# Altium PCB PCB2.PcbDoc (part 1 of 2)
Units mil, origin at the board's own origin, x right, y up, seen from the top; angles counter-clockwise.
Board outline 6000 x 4000 mil, 2 copper layers (Top Layer, Bottom Layer); 194 components, 0 nets, 778 pads, 711 vias.
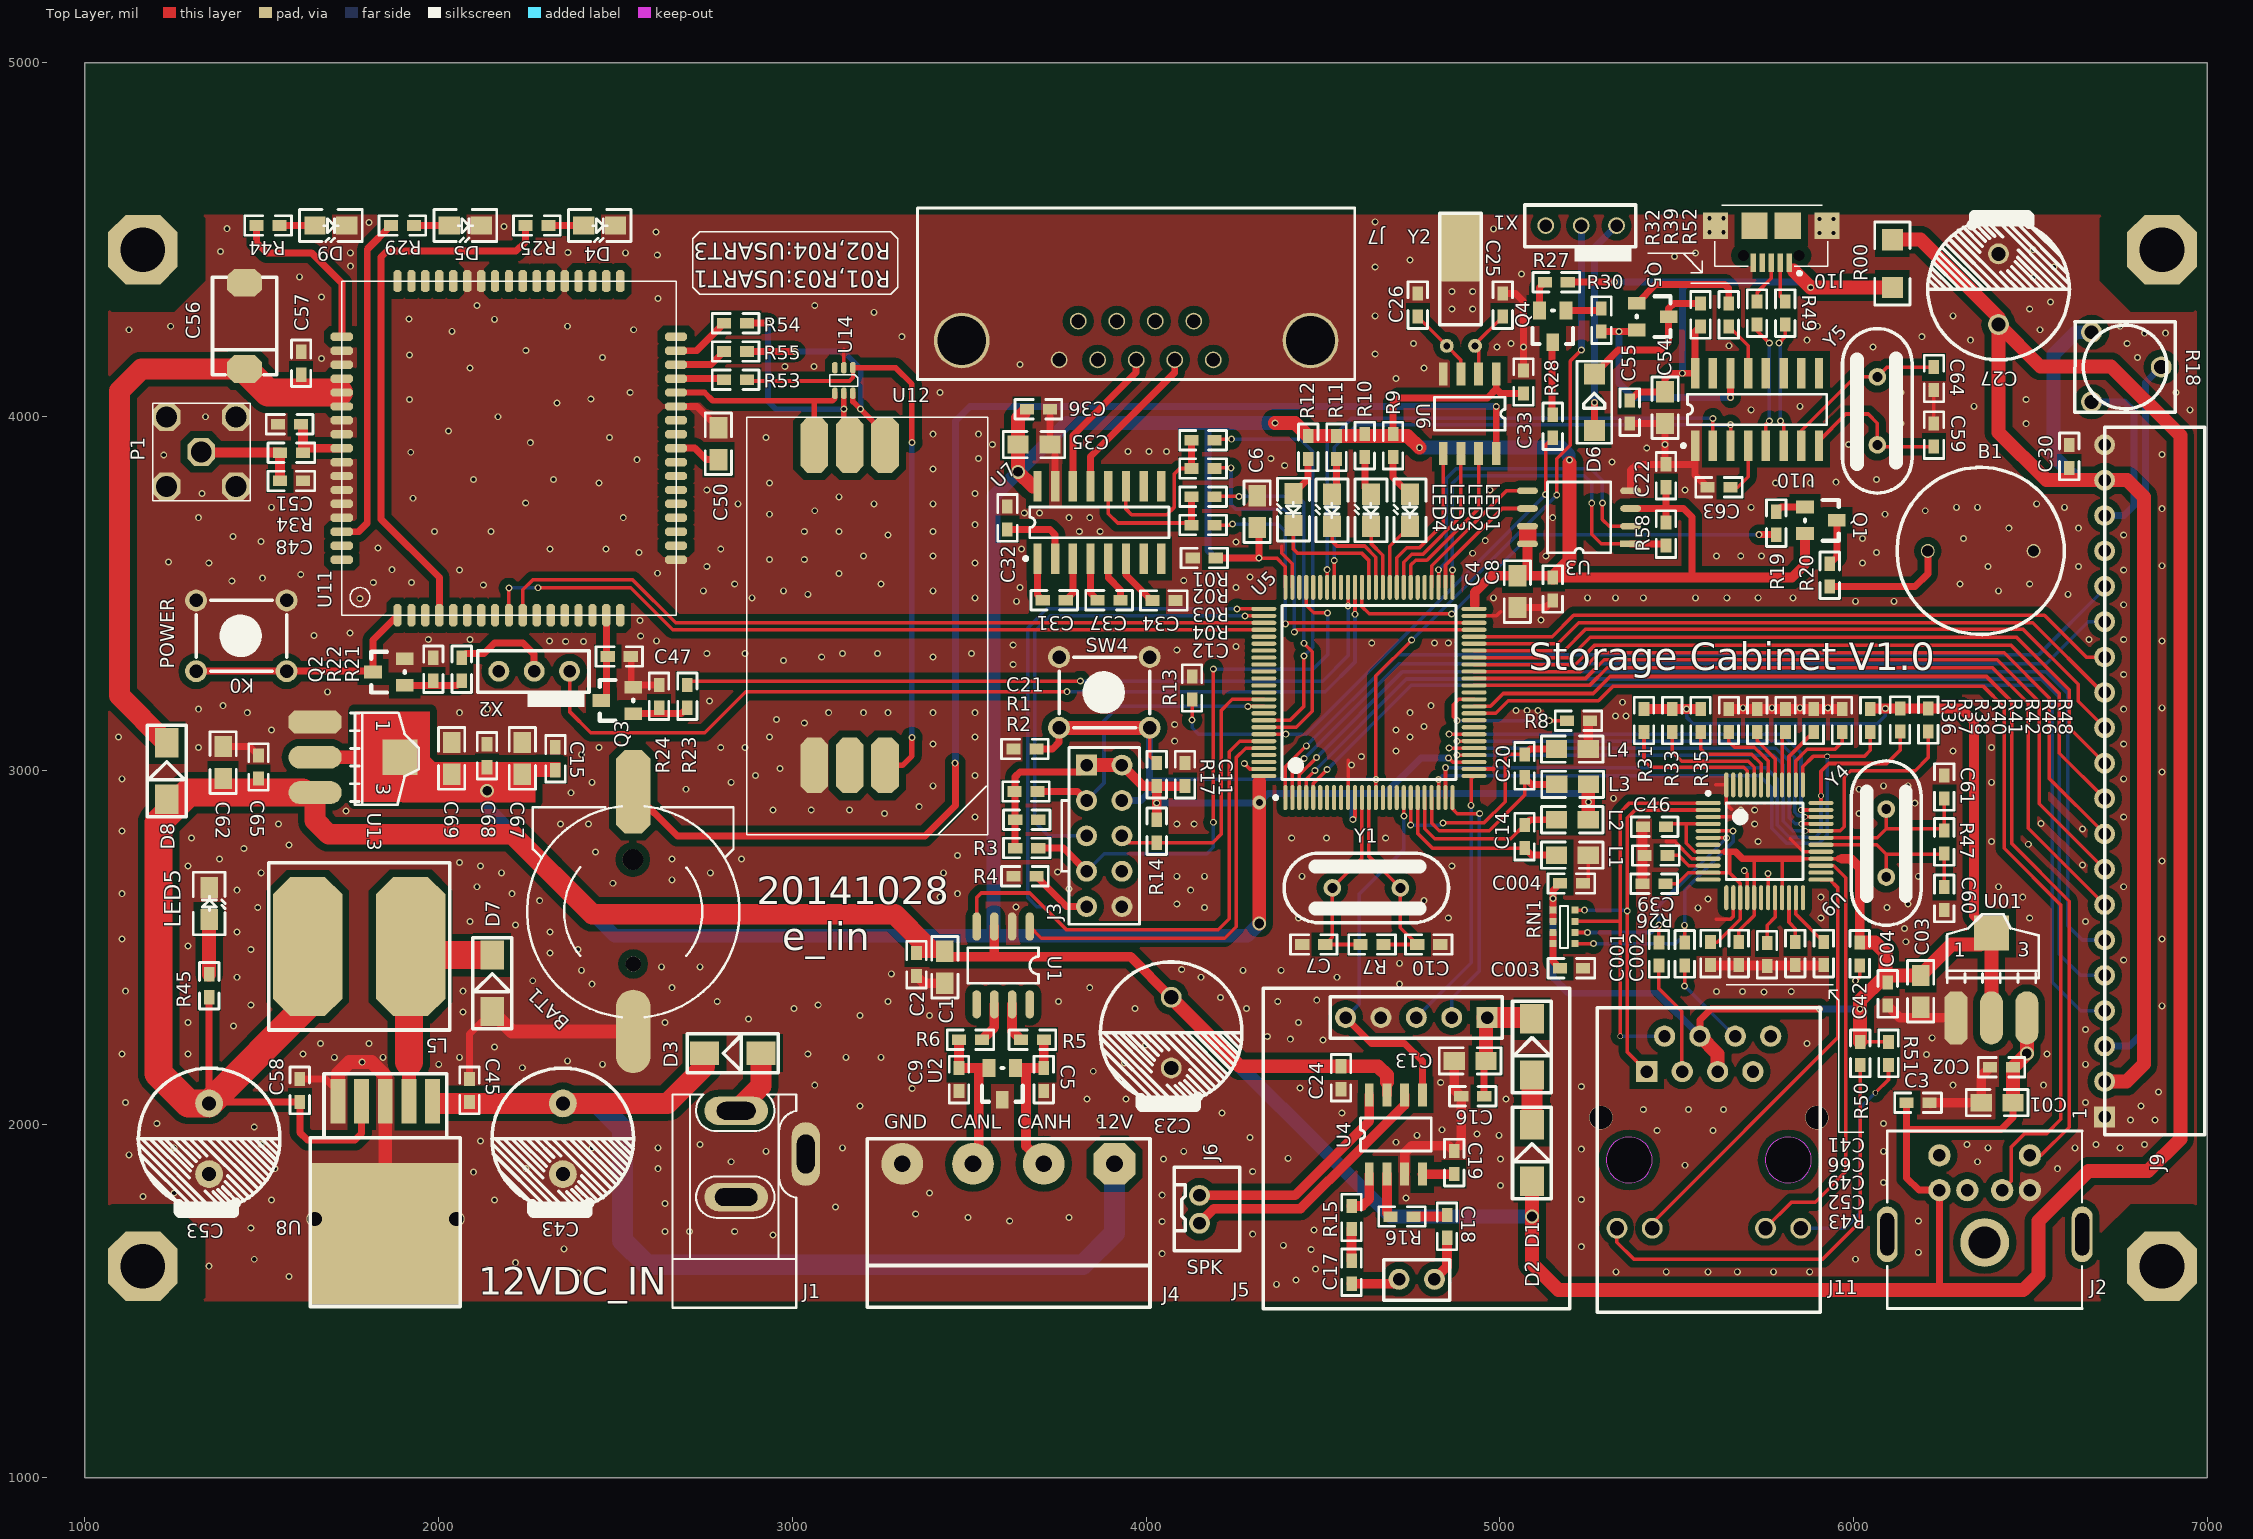
[diagram p0: Top Layer view]
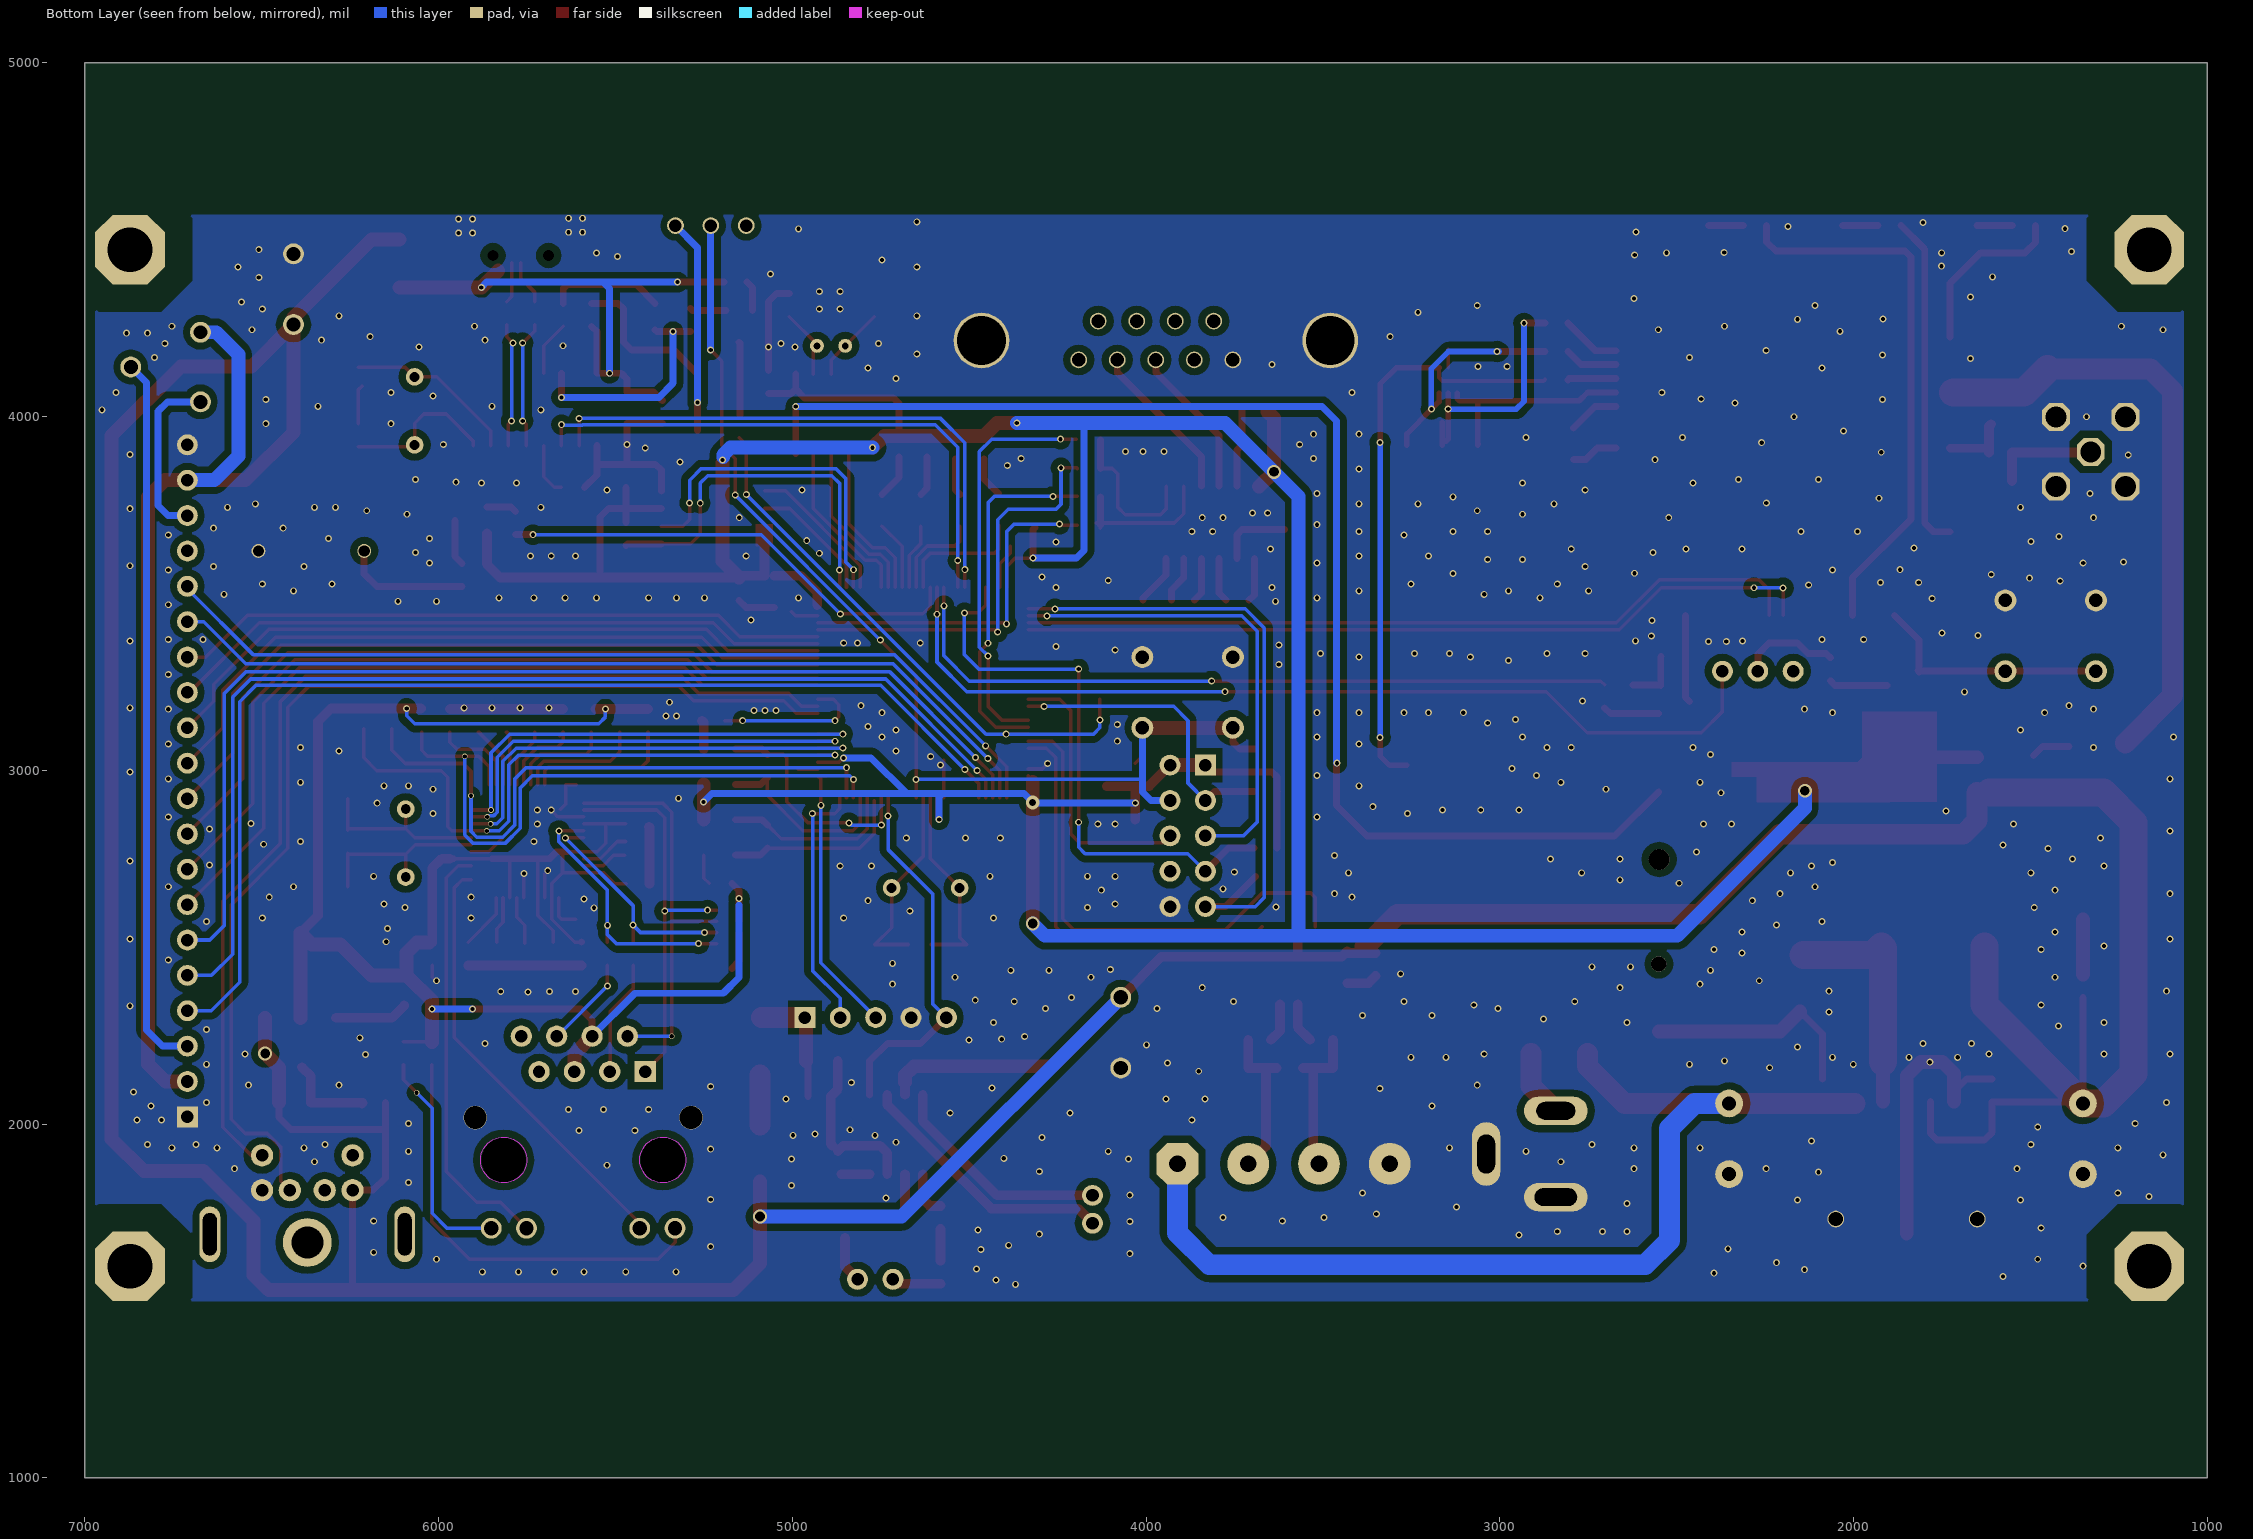
[diagram p1: Bottom Layer view, seen from below]

## Layer stack, top to bottom
Top Layer: signal copper 1.4
Dielectric: dielectric 12.6, FR-4, Dk 4.8
Bottom Layer: signal copper 1.4

## Board outline
1000,1000 7000,1000 7000,5000 1000,5000

## Design rules (kind name [scope] priority, off if disabled: settings)
Clearance [All] p1: gap=10
PolygonConnect [All] p1: connectstyle=Relief reliefconductorwidth=10 reliefentries=4 polygonreliefangle="90 Angle"
RoutingVias [All] p1: holewidth=28 width=50 viastyle="Through Hole" minholewidth=28 minwidth=50 maxholewidth=28 maxwidth=50
SilkscreenOverComponentPads [All] p1: minsilkscreentomaskgap=10
SolderMaskExpansion [All] p1: expansion=4
Width [All] p1: maxlimit=10 minlimit=10 preferedwidth=10
27 further rules are at their usual default settings.

## Components (designator, comment, footprint, x,y, rotation, side; value= is the part's Value field where it differs from the comment)
B1 "BEEP" BEEP-12 6210.28,3620.17 r0 top locked
BAT1 "BATT" BATM 2550.28,2600.17 r180 top locked
C1 "10uF/16V" 0805 3431.26,2398.2 r90 top locked
C01 "10uF" 0805 6451.28,2060.17 r180 top locked
C001 "6.8nF" 0603 5450.28,2448.36 r90 top
C2 "0.1uF" 0603 3351.26,2418.2 r90 top locked
C02 "0.1uF" 0603 6451.28,2160.17 r180 top locked
C002 "6.8nF" 0603 5522.88,2448.36 r90 top
C3 "0.1uF" 0603 6150.28,2060.17 r0 top locked
C03 "10uF" 0805 6190.28,2420.17 r270 top locked
C003 "10nF" 0603 5170.28,2440.17 r0 top
C4 "10uF/25V" 0805 5050.28,3460.17 r90 top locked
C04 "0.1uF" 0603 6096.89,2400.17 r270 top locked
C004 "10nF" 0603 5170.28,2680.17 r0 top
C5 "470pF" 0603 3711.26,2158.2 r270 top locked
C6 "10uF/25V" 0805 4314.28,3776.17 r270 top locked
C7 "18p" 0603 4506.89,2507.45 r180 top locked
C8 "0.1uF" 0603 5150.28,3480.17 r90 top locked
C9 "470pF" 0603 3471.26,2158.2 r270 top locked
C10 "18p" 0603 4766.89,2507.45 r0 top locked
C11 "0.1uF" 0603 4110.28,3020.17 r270 top locked
C12 "0.1uF" 0603 4132.28,3600.17 r0 top locked
C13 "10uF/16V" 0805 4871.26,2178.2 r0 top locked
C14 "0.1uF" 0603 5070.28,2780.17 r90 top locked
C15 "0.1uF" 0603 2330.28,3000.17 r90 top locked
C16 "0.1uF" 0603 4891.26,2078.2 r0 top locked
C17 "1uF" 0603 4581.26,1548.2 r90 top locked
C18 "1uF" 0603 4851.26,1678.2 r90 top locked
C19 "1uF" 0603 4871.26,1858.2 r90 top locked
C20 "0.1uF" 0603 5070.28,2980.17 r90 top locked
C21 "0.1uF" 0603 3690.28,3060.17 r180 top locked
C22 "0.1uF" 0603 5470.28,3800.17 r90 top locked
C23 "470uF" RB5.0-8#1 4071.26,2358.2 r90 top locked
C24 "0.1uF" 0603 4551.26,2098.2 r90 top locked
C25 "20pF" 0603 5008.55,4347.57 r270 top locked
C26 "20pF" 0603 4768.55,4347.57 r270 top locked
C27 "470uF" RB5.0-8#1 6410.28,4260.17 r270 top locked
C30 "0.1uF" 0603 6610.28,3920.17 r270 top locked
C31 "0.1uF" 0603 3708.26,3480.98 r0 top locked
C32 "0.1uF" 0603 3608.26,3680.98 r90 top locked
C33 "0.1uF" 0603 5067.45,4130.41 r270 top locked
C34 "0.1uF" 0603 4018.15,3480.17 r0 top locked
C35 "10uF" 0805 3728.26,3920.98 r180 top locked
C36 "0.1uF" 0603 3728.26,4020.98 r180 top locked
C37 "0.1uF" 0603 3928.26,3480.98 r180 top locked
C39 "0.1uF" 0603 5469,2679.2 r180 top locked
C41 "0.1uF" 0603 5676,2514.2 r270 top locked
C42 "0.1uF" 0603 6018.15,2513.32 r270 top locked
C43 "470uF" RB5.0-8#2 2351.26,2058.2 r90 top locked
C45 "0.1uF" 0603 2087.49,2127.65 r270 top locked
C46 "0.1uF" 0603 5470.28,2840.17 r180 top locked
C47 "0.1uF" 0603 2543.39,3321.66 r180 top locked
C48 "NC" 0603 1551.26,3818.2 r0 top locked
C49 "4.7uF" 0603 5756,2446.39 r90 top locked
C50 "10uF" 0805 2791.26,3878.2 r90 top locked
C51 "NC" 0603 1611.26,3978.2 r180 top locked
C52 "10nF" 0603 5836,2514.2 r270 top locked
C53 "470uF" RB5.0-8#2 1351.26,2058.2 r90 top locked
C54 "10uF" 0805 5467.6,3980.17 r90 top locked
C55 "0.1uF" 0603 5367.6,3980.17 r90 top locked
C56 "1000uF/6.3V" 7343 1451.26,4138.2 r90 top locked
C57 "0.1uF" 0603 1611.26,4118.2 r90 top locked
C58 "0.1uF" 0603 1607.49,2127.65 r270 top locked
C59 "18pF" 0603 6227.6,3980.17 r270 top locked
C60 "18p" 0603 6257,2605.2 r90 top locked
C61 "18p" 0603 6257,2985.2 r270 top locked
C62 "10uF" 0805 1390.95,2976.94 r90 top locked
C63 "0.1uF" 0603 5587.6,3800.17 r0 top locked
C64 "18pF" 0603 6227.6,4140.17 r270 top locked
C65 "0.1uF" 0603 1490.95,2976.94 r90 top locked
C66 "0.1uF" 0603 5596,2514.2 r270 top
C67 "10uF" 0805 2236.78,2988.59 r90 top locked
C68 "0.1uF" 0603 2136.78,3008.59 r90 top locked
C69 "10uF" 0805 2036.78,2988.59 r90 top locked
D1 "M7" SMB 5091.26,2138.2 r90 top locked
D2 "M7" SMB 5091.26,1838.2 r90 top locked
D3 "B340" SMB 2911.26,2200.17 r180 top locked
D4 "LED-R" LED-0805 2410.28,4540.17 r0 top
D5 "LED-R" LED-0805 2030.28,4540.17 r0 top
D6 "IN4148" SOD-23 5267.6,3920.17 r90 top
D7 "B340" SMB 2151.26,2318.2 r90 top locked
D8 "B340" SMB 1231.26,2918.2 r90 top locked
D9 "LED-R" LED-0805 1650.28,4540.17 r0 top
J1 "POWER" DC10B 3011.26,1618.2 r90 top locked
J2 "PS2" PS2-6PIN 6371.26,1478.2 r180 top locked
J3 "JTAG_10" JTAG_10 3832.01,3014.66 r270 top locked
J4 "SIP4A-2.50(带槽)" 5.08_4P 4011.26,1958.2 r180 top locked
J5 "2.54-7" SYN6288 4331.26,1478.2 r0 top locked
J6 "SIP2A-2.50（带槽）" 2.0-2P 4151.26,1798.2 r270 top locked
J7 "DB9" DB9/M 4190.28,4160.17 r180 top locked
J9 "12864" XH2.54-20P 6710.28,2020.17 r90 top locked
J10 "microb usb" USB_micro 5767.6,4540.17 r180 top locked
J11 "HR911105A" HR911105A 5591.26,1898.2 r180 top locked
K0 "KEY_M" KEY_M 1570.28,3280.17 r180 top
L1 "100uH" 0805 5250.28,2760.17 r180 top locked
L2 "100uH" 0805 5250.28,2860.17 r180 top locked
L3 "100uH" 0805 5161.07,2960.17 r0 top locked
L4 "100uH" 0805 5250.28,3060.17 r180 top locked
L5 "33uH" INDUCTOR-1212 2031.26,2738.2 r180 top locked
LED1 "" LED-0805 4746.5,3780.17 r270 top locked
LED2 "" LED-0805 4636.26,3780.17 r270 top locked
LED3 "" LED-0805 4526.03,3780.17 r270 top locked
LED4 "" LED-0805 4416.9,3782.42 r270 top locked
LED5 "LED-R" LED-0805 1351.26,2578.2 r90 top locked
P1 "COAX-M" ST-TH1 1191.26,4038.2 r270 top locked
Q1 "3906" SOT-23 5863.38,3744.24 r270 top locked
Q2 "3904" SOT-23 1904.28,3240.17 r90 top
Q3 "3904" SOT-23 2550.28,3160.17 r90 top
Q4 "3906" SOT-23 5187.6,4300.17 r180 top locked
Q5 "3904" SOT-23 5387.6,4320.17 r270 top locked
R00 "NC" 1206 6110.28,4500.17 r270 top
R1 "10K" 0603 3628.28,2940.17 r0 top locked
R01 "0" 0603 4129.08,3933.24 r0 top locked
R2 "10K" 0603 3630.28,2860.17 r0 top locked
R02 "0" 0603 4129.08,3853.24 r0 top locked
R3 "10K" 0603 3630.28,2780.17 r0 top locked
R03 "0" 0603 4129.08,3773.24 r0 top locked
R4 "10K" 0603 3690.28,2700.17 r180 top locked
R04 "0" 0603 4129.08,3693.24 r0 top locked
R5 "10" 0603 3711.26,2238.2 r180 top locked
R6 "10" 0603 3471.26,2238.2 r0 top locked
R7 "1M" 0603 4606.89,2507.45 r0 top locked
R8 "10K" 0603 5190.28,3140.17 r0 top locked
R9 "1K" 0603 4698.54,3885.54 r90 top locked
R10 "1K" 0603 4618.54,3885.54 r90 top locked
R11 "1K" 0603 4538.54,3945.54 r270 top locked
R12 "1K" 0603 4458.54,3945.54 r270 top locked
R13 "10K" 0603 4130.28,3200.17 r90 top locked
R14 "10K" 0603 4030.28,2860.17 r270 top locked
R15 "1K" 0603 4581.26,1768.2 r270 top locked
R16 "1K" 0603 4691.26,1738.2 r0 top locked
R17 "10K" 0603 4030.28,3020.17 r270 top locked
R18 "10K" RM065-V1 6870.28,4140.17 r180 top locked
R19 "1K" 0603 5782.28,3731.17 r270 top locked
R20 "22" 0603 5933.28,3519.17 r90 top locked
R21 "1K" 0603 2065.26,3318.2 r270 top locked
R22 "10K" 0603 1985.26,3318.2 r270 top locked
R23 "1K" 0603 2703.39,3241.66 r270 top locked
R24 "10K" 0603 2623.39,3241.66 r270 top locked
R25 "1K" 0603 2310.28,4540.17 r180 top
R26 "12.4K" 0603 5409,2759.2 r0 top locked
R27 "22" 0603 5127.6,4380.17 r0 top locked
R28 "1K" 0603 5150.28,3940.17 r90 top locked
R29 "1K" 0603 1930.28,4540.17 r180 top
R30 "1K" 0603 5287.6,4240.17 r90 top locked
R31 "10K" 0603 5408,3173.2 r270 top locked
R32 "2K" 0603 5567.6,4320.17 r270 top locked
R33 "10K" 0603 5488,3173.2 r270 top locked
R34 "0R" 0603 1551.26,3898.2 r0 top locked
R35 "10K" 0603 5568,3173.2 r270 top locked
R36 "10K" 0603 5648,3173.2 r270 top locked
R37 "10K" 0603 5728,3173.2 r270 top locked
R38 "10K" 0603 5808,3173.2 r270 top locked
R39 "1K" 0603 5647.6,4320.17 r270 top locked
R40 "10K" 0603 5888,3173.2 r270 top locked
R41 "10K" 0603 5968,3173.2 r270 top locked
R42 "10K" 0603 6048,3173.2 r270 top locked
R43 "10K" 0603 5916,2514.2 r270 top locked
R44 "1K" 0603 1550.28,4540.17 r180 top
R45 "1K" 0603 1351.26,2358.2 r90 top locked
R46 "10K" 0603 6132,3174.74 r270 top locked
R47 "1M" 0603 6257,2765.2 r90 top locked
R48 "10K" 0603 6212,3174.74 r270 top locked
R49 "0" 0603 5807.6,4260.17 r90 top locked
R50 "270" 0603 6019.26,2232.2 r270 top locked
R51 "270" 0603 6099.26,2232.2 r270 top locked
R52 "0" 0603 5727.6,4260.17 r90 top locked
R53 "22" 0603 2872.05,4104.03 r180 top locked
R54 "22" 0603 2872.05,4264.03 r180 top locked
R55 "22" 0603 2872.05,4184.03 r180 top locked
R58 "10K" 0603 5470.28,3700.17 r270 top locked
RN1 "51R" 0603-4 5150.28,2620.17 r270 top
SW4 "KEY_M" KEY_M 4010.28,3120.17 r180 top locked
U1 "TAJ1050" SO-8 3671.26,2558.2 r270 top locked
U01 "LM1117" AMS1117 6290.28,2300.17 r0 top locked
U2 "TVS_CAN" SOT-23 3631.26,2158.2 r180 top locked
U3 "SST25VF016B" SOIC-8 5370.28,3640.17 r180 top locked
U4 "SNAP01" sop-8 4631.26,1858.2 r90 top locked
U5 "STM32F103VET6" LQFP100_N 4630.28,3220.17 r90 top locked
U6 "DS1302" SOP-8 4990.28,4120.17 r270 top locked
U7 "MAX3232" SOP16 3868.26,3700.98 r0 top locked
U8 "LM2596S_5.0" TO-263-5 1983.08,2064.03 r90 top locked
U9 "W5500" LQFP48_N 5749,2799.2 r0 top locked
U10 "CH340" SOP16 5727.6,4020.17 r0 top locked
U11 "SIM900" SIM-900 2671.26,3438.2 r90 top locked
U12 "SIM" sim-6p 2871.26,3998.2 r270 top locked
U13 "LM1117" AMS1117 1650.95,3136.94 r270 top locked
U14 "SMF05" SC70-6L 3171.26,4138.2 r270 top locked
X1 "2.54-TX" 2.54-TX#1 5070.28,4480.17 r0 top
X2 "2.54-TX" 2.54-TX#2 2110.28,3220.17 r0 top
Y1 "8MHz" XTAL_US 4526.89,2667.45 r0 top locked
Y2 "32.768KHz" cs-308 4830.28,4260.17 r90 top locked
Y4 "25MHz" XTAL_US 6093,2698.2 r90 top locked
Y5 "12M" XTAL_US 6067.6,3920.17 r90 top locked

## Footprints (in the part's own frame and the unit in brackets; to place one, negate y for a bottom-side part, rotate by r counter-clockwise, add the part's x,y. Pads: shape width x height; smd on the part's side, far side on the other; paste and mask are expansions set on the pad)
2.0-2P [mm]
  round 1.5 hole 0.9: 1(0,0) 2(2,0)
  silkscreen extent -2.03,-1.8 3.97,2.9
2.54-TX#1 [mm]
  round 1.2 hole 0.9: 1(6.604,1.524) 2(4.064,1.524) 3(1.524,1.524)
  silkscreen extent 0,0 8,3
2.54-TX#2 [mm]
  round 1.5 hole 0.9: 1(6.604,1.524) 2(4.064,1.524) 3(1.524,1.524)
  silkscreen extent 0,0 8,3
5.08_4P [mm]
  oct 3x3 hole 1.2: 1(2.55,1.8)
  round 3 hole 1.2: 2(7.63,1.8) 3(12.71,1.8) 4(17.79,1.8)
  silkscreen extent 0,0 20.32,12.11
0603 [mil]
  rect 40x30 smd: 1(0,0) 2(65,0)
  silkscreen extent -33,-28 98,28
0603-4 [mm]
  rect 0.5x0.5 smd: 1(0.4,0) 2(0.4,1.6) 3(1.2,0) 4(1.2,1.6) 5(2,0) 6(2,1.6) 7(2.8,0) 8(2.8,1.6)
  silkscreen extent 0.1,0.5 3.1,1.1
0805 [mil]
  rect 60x50 smd: 1(0,0) 2(90,0)
  silkscreen extent -42,-37 132,37
1206 [mil]
  rect 60x60 smd: 1(0,0) 2(135,0)
  silkscreen extent -50,-50 185,50
7343 [mm]
  oct 2x2.5 smd: 1(-0.1,0) 2(6.1,0)
  silkscreen extent -0.5,-2.3 6.5,2.3
AMS1117 [mil]
  oct 65x150 smd: 1(0.03,-0.06)
  oval 65x150 smd: 2(100.03,-0.06) 3(200.03,-0.06)
  rect 100x100 smd: 4(100.03,239.94)
  silkscreen extent -26,100 234,293
BATM [mm]
  round 1.1 hole 1.1 unplated: 0(0,3.748)
  round 1.5 hole 1.5 unplated: 0(0.025,-3.752)
  oct 2.5x6 smd: 1(0,-8.602)
  oval 2.5x6 smd: 2(0,8.598)
  silkscreen extent -7.62,-7.58 7.62,7.57
BEEP-12 [mm]
  round 1 hole 0.8: 1(0,0) 2(7.6,0)
  silkscreen extent -2.2,-6 9.8,6
cs-308 [mm]
  round 1 hole 0.5: 1(-1.524,-0.508) 2(-1.524,-2.54)
  rect 5x3 smd: 3(5.588,-1.524)
  silkscreen extent 0,-3 8,0
DB9/M [mil]
  round 47.24 hole 38: 1(0,0) 2(109,0) 3(218,0) 4(327,0) 5(436,0) 6(55,-110) 7(164,-110) 8(273,-110) 9(382,-110)
  round 157.48 hole 138: 10(711,-55) 11(-275,-55)
  silkscreen extent -400,-430 836,55
DC10B [mil]
  oval 80x180 hole 50 slot 110 at 90 deg: 1(419.09,170)
  oval 80x180 hole 50 slot 120 at 90 deg: 2(175,170)
  oval 180x80 hole 50 slot 110 at 0 deg: 3(297.05,-26.85)
  silkscreen extent -138,0 465,350
HR911105A [mil]
  rect 60x60 hole 35: 1(175.2,-250)
  round 60 hole 35: 2(125.2,-350) 3(75.2,-250) 4(25.2,-350) 5(-24.8,-250) 6(-74.8,-350) 7(-124.8,-250) 8(-174.8,-350)
  round 59.06 hole 40.16: 9(259.84,192.91) 12(-259.84,192.91)
  round 59.05 hole 40.16: 10(160,192.91) 11(-160,192.91)
  round 66.93 hole 64.96: 13(305.12,-120) 14(-305.12,-120)
  Keep-Out Layer circle w2: c-224.96,0 r64.96
  Keep-Out Layer circle w2: c225.04,0 r64.96
  silkscreen extent -315,-430 315,430
INDUCTOR-1212 [mm]
  oct 5x10 smd: 1(2.8,6) 2(10.2,6)
  silkscreen extent 0,0 13,12
JTAG_10 [mm]
  rect 1.5x1.5 hole 0.9: 1(0,0)
  round 1.5 hole 0.9: 2(0,2.54) 3(2.54,0) 4(2.54,2.54) 5(5.08,0) 6(5.08,2.54) 7(7.62,0) 8(7.62,2.54) 9(10.16,0) 10(10.16,2.54)
  silkscreen extent -1.27,-1.78 11.43,3.81
KEY_M [mil]
  round 62 hole 38: 1(0,0) 1(255.91,0) 2(0,-200) 2(255.91,-200)
  silkscreen extent 0,-200 255,0
LED-0805 [mil]
  rect 60x50 smd: 1(0,0) 2(90,0)
  silkscreen extent -43,-46 134,45
LQFP48_N [mm] "Thin QFP, 48-Leads, Body 7x7mm, Pitch 0.5mm, IPC Medium Density"
  oval 1.8x0.3 smd: 1(-4.05,2.75) 2(-4.05,2.25) 3(-4.05,1.75) 4(-4.05,1.25) 5(-4.05,0.75) 6(-4.05,0.25) 7(-4.05,-0.25) 8(-4.05,-0.75) 9(-4.05,-1.25) 10(-4.05,-1.75) 11(-4.05,-2.25) 12(-4.05,-2.75) 25(4.05,-2.75) 26(4.05,-2.25) 27(4.05,-1.75) 28(4.05,-1.25) 29(4.05,-0.75) 30(4.05,-0.25) 31(4.05,0.25) 32(4.05,0.75) 33(4.05,1.25) 34(4.05,1.75) 35(4.05,2.25) 36(4.05,2.75)
  oval 0.3x1.8 smd: 13(-2.75,-4.05) 14(-2.25,-4.05) 15(-1.75,-4.05) 16(-1.25,-4.05) 17(-0.75,-4.05) 18(-0.25,-4.05) 19(0.25,-4.05) 20(0.75,-4.05) 21(1.25,-4.05) 22(1.75,-4.05) 23(2.25,-4.05) 24(2.75,-4.05) 37(2.75,4.05) 38(2.25,4.05) 39(1.75,4.05) 40(1.25,4.05) 41(0.75,4.05) 42(0.25,4.05) 43(-0.25,4.05) 44(-0.75,4.05) 45(-1.25,4.05) 46(-1.75,4.05) 47(-2.25,4.05) 48(-2.75,4.05)
  silkscreen extent -4.17,-2.75 2.75,3.57, body extent -3.5,-3.5 3.5,3.5, height 1.6
LQFP100_N [mm] "Thin QFP, 100-Leads, Body 14x14mm, Pitch 0.5mm, IPC Medium Density"
  oval 1.8x0.3 smd: 1(-7.55,6) 2(-7.55,5.5) 3(-7.55,5) 4(-7.55,4.5) 5(-7.55,4) 6(-7.55,3.5) 7(-7.55,3) 8(-7.55,2.5) 9(-7.55,2) 10(-7.55,1.5) 11(-7.55,1) 12(-7.55,0.5) 13(-7.55,0) 14(-7.55,-0.5) 15(-7.55,-1) 16(-7.55,-1.5) 17(-7.55,-2) 18(-7.55,-2.5) 19(-7.55,-3) 20(-7.55,-3.5) 21(-7.55,-4) 22(-7.55,-4.5) 23(-7.55,-5) 24(-7.55,-5.5) 25(-7.55,-6) 51(7.55,-6) 52(7.55,-5.5) 53(7.55,-5) 54(7.55,-4.5) 55(7.55,-4) 56(7.55,-3.5) 57(7.55,-3) 58(7.55,-2.5) 59(7.55,-2) 60(7.55,-1.5) 61(7.55,-1) 62(7.55,-0.5) 63(7.55,0) 64(7.55,0.5) 65(7.55,1) 66(7.55,1.5) 67(7.55,2) 68(7.55,2.5) 69(7.55,3) 70(7.55,3.5) 71(7.55,4) 72(7.55,4.5) 73(7.55,5) 74(7.55,5.5) 75(7.55,6)
  oval 0.3x1.8 smd: 26(-6,-7.55) 27(-5.5,-7.55) 28(-5,-7.55) 29(-4.5,-7.55) 30(-4,-7.55) 31(-3.5,-7.55) 32(-3,-7.55) 33(-2.5,-7.55) 34(-2,-7.55) 35(-1.5,-7.55) 36(-1,-7.55) 37(-0.5,-7.55) 38(0,-7.55) 39(0.5,-7.55) 40(1,-7.55) 41(1.5,-7.55) 42(2,-7.55) 43(2.5,-7.55) 44(3,-7.55) 45(3.5,-7.55) 46(4,-7.55) 47(4.5,-7.55) 48(5,-7.55) 49(5.5,-7.55) 50(6,-7.55) 76(6,7.55) 77(5.5,7.55) 78(5,7.55) 79(4.5,7.55) 80(4,7.55) 81(3.5,7.55) 82(3,7.55) 83(2.5,7.55) 84(2,7.55) 85(1.5,7.55) 86(1,7.55) 87(0.5,7.55) 88(0,7.55) 89(-0.5,7.55) 90(-1,7.55) 91(-1.5,7.55) 92(-2,7.55) 93(-2.5,7.55) 94(-3,7.55) 95(-3.5,7.55) 96(-4,7.55) 97(-4.5,7.55) 98(-5,7.55) 99(-5.5,7.55) 100(-6,7.55)
  silkscreen extent -7.67,-6.25 6.25,6.82, body extent -7,-7 7,7, height 1.6
PS2-6PIN [mm]
  round 1.6 hole 0.9: 1(-1.25,-8.5) 2(1.25,-8.5) 3(-3.25,-8.5) 4(3.25,-8.5) 5(-3.25,-11) 6(3.25,-11)
  oval 1.5x4 hole 1 slot 3.048 at 90 deg: 7(-7,-5.334) 9(7,-5.334)
  round 3.5 hole 2.3: S(0,-4.75)
  silkscreen extent -7,-12.75 7,0
RB5.0-8#1 [mm]
  round 1.5 hole 1.016: 1(0,0) 2(-5.08,0)
  silkscreen extent -7.84,-5.08 2.54,5.11
RB5.0-8#2 [mm]
  round 2 hole 1.016: 1(0,0) 2(-5.08,0)
  silkscreen extent -7.84,-5.08 2.54,5.11
RM065-V1 [mm]
  round 1.5 hole 1: 1(5,-2.5) 2(0,0) 3(5,2.5)
  silkscreen extent -1.02,-3.25 6.2,3.25
SC70-6L [mm]
  oct 0.85x0.4 smd: 1(0,0) 2(0,-0.65) 3(0,-1.3) 4(1.829,-1.3) 5(1.829,-0.65) 6(1.829,0)
  silkscreen extent 0.51,-1.64 1.32,0.36
sim-6p [mm]
  oct 4x2 smd: 1(25,9.93) 2(25,7.39) 3(25,4.85) 4(2,9.93) 5(2,7.39) 6(2,4.85)
  silkscreen extent 0,0 30,17.3
SIM-900 [mm]
  oct 1.6x0.6 smd: 1(0,20) 2(0,19) 3(0,18) 4(0,17) 5(0,16) 6(0,15) 7(0,14) 8(0,13) 9(0,12) 10(0,11) 11(0,10) 12(0,9) 13(0,8) 14(0,7) 15(0,6) 16(0,5) 17(0,4) 35(24,4) 36(24,5) 37(24,6) 38(24,7) 39(24,8) 40(24,9) 41(24,10) 42(24,11) 43(24,12) 44(24,13) 45(24,14) 46(24,15) 47(24,16) 48(24,17) 49(24,18) 50(24,19) 51(24,20)
  oct 0.6x1.6 smd: 18(4,0) 19(5,0) 20(6,0) 21(7,0) 22(8,0) 23(9,0) 24(10,0) 25(11,0) 26(12,0) 27(13,0) 28(14,0) 29(15,0) 30(16,0) 31(17,0) 32(18,0) 33(19,0) 34(20,0) 52(20,24) 53(19,24) 54(18,24) 55(17,24) 56(16,24) 57(15,24) 58(14,24) 59(13,24) 60(12,24) 61(11,24) 62(10,24) 63(9,24) 64(8,24) 65(7,24) 66(6,24) 67(5,24) 68(4,24)
  silkscreen extent 0,0 24,24
SMB [mm]
  rect 2.1x1.7 smd: 1(0,0) 2(4.05,0)
  silkscreen extent -1.25,-1.4 5.3,1.4
SO-8 [mil]
  oval 80x24 smd: 1(0,0) 2(0,-50) 3(0,-100) 4(0,-150) 5(220,-150) 6(220,-100) 7(220,-50) 8(220,0)
  silkscreen extent 60,-175 160,25
SOD-23 [mm]
  rect 1.5x1.5 smd: 1(1.016,0) 2(5.1,0)
  silkscreen extent 0.12,-1.25 6,1.25
SOIC-8 [mm]
  rect 1.5x0.48 smd: 1(0,0)
  oval 1.5x0.48 smd: 2(0,-1.27) 3(0,-2.54) 4(0,-3.81) 5(7.41,-3.81) 6(7.41,-2.54) 7(7.41,-1.27) 8(7.41,0)
  silkscreen extent 1.44,-4.44 5.98,0.64
SOP16 [mm]
  rect 0.6x2.2 smd: 1(-4.445,-2.6) 2(-3.175,-2.6) 3(-1.905,-2.6) 4(-0.635,-2.6) 5(0.635,-2.6) 6(1.905,-2.6) 7(3.175,-2.6) 8(4.445,-2.6) 9(4.445,2.6) 10(3.175,2.6) 11(1.905,2.6) 12(0.635,2.6) 13(-0.635,2.6) 14(-1.905,2.6) 15(-3.175,2.6) 16(-4.445,2.6)
  silkscreen extent -5.42,-2.72 5,1.1
sop-8 [mil]
  rect 65x25 smd: 1(0,0) 2(0,-50) 3(0,-100) 4(0,-150) 5(224.41,-150) 6(224.41,-100) 7(224.41,-50) 8(224.41,0)
  silkscreen extent 65,-175 159,25
SOP-8 [mil]
  rect 65x25 smd: 1(0,0) 2(0,-50) 3(0,-100) 4(0,-150) 5(224.41,-150) 6(224.41,-100) 7(224.41,-50) 8(224.41,0)
  silkscreen extent 65,-175 159,25
SOT-23 [mil]
  rect 36x50 smd: 1(0,0) 2(75,0) 3(37.5,90)
  silkscreen extent -20,0 95,95
ST-TH1 [mm]
  oct 2x2 hole 1.5: 1(3.5,3.5) 2(1,6) 3(6,6) 4(6,1) 5(1,1)
  silkscreen extent 0,0 7,7
SYN6288 [mm]
  rect 1.5x1.5 hole 0.9: 1(16.08,20.9)
  round 1.5 hole 0.9: 2(13.54,20.9) 3(11,20.9) 4(8.46,20.9) 5(5.92,20.9) 6(9.76,2.1) 7(12.3,2.1)
  silkscreen extent 0,0 22,23
TO-263-5 [mm]
  rect 3.176x1.07 smd: 1(0,0) 2(0,1.7) 3(0,3.4) 4(0,5.1) 5(0,6.8)
  round 1.2 hole 1.016: 6(-8.45,-1.695) 8(-8.45,8.465)
  rect 10.16x10.668 smd: 7(-9.5,3.404)
  silkscreen extent -14.73,-2 1.98,8.8
USB_micro [mm]
  rect 1.8x1.9 smd: 0(-4,0) 0(4,0)
  round 0 hole 0.8: 0(-2,2.15) 0(2,2.15)
  rect 1.9x1.9 smd: 0(-1.2,0) 0(1.2,0)
  rect 0.4x1.35 smd: 1(-1.3,2.675) 2(-0.65,2.675) 3(0,2.675) 4(0.65,2.675) 5(1.3,2.675)
  silkscreen extent -4.06,-1.45 4.06,3.55
XH2.54-20P [mm]
  rect 1.5x1.5 hole 0.9: 1(0,0)
  round 1.5 hole 0.9: 2(2.54,0) 3(5.08,0) 4(7.62,0) 5(10.16,0) 6(12.7,0) 7(15.24,0) 8(17.78,0) 9(20.32,0) 10(22.86,0) 11(25.4,0) 12(27.94,0) 13(30.48,0) 14(33.02,0) 15(35.56,0) 16(38.1,0) 17(40.64,0) 18(43.18,0) 19(45.72,0) 20(48.26,0)
  silkscreen extent -1.27,-7.2 49.53,0
XTAL_US [mil]
  round 50 hole 28: 1(0,0) 2(192.13,0)
  silkscreen extent -136,-98 328,98

## Part data
B1: library part SPEAKER
BAT1: library part BAT
C1 C2 C5 C7 C9 C10 C13 C15 C16 C17 C18 C19 C22 C24 C31 C32 C33 C34 C35 C36 C37: library part CAP, "陶瓷电容"
C01 C02 C3 C03 C003 C4 C04 C004 C6 C8 C11 C12 C14 C20 C21 C23 C27 C39 C41 C42 C43 C46 C50 C52 C53 C55 C56 C62 C63 C65 C66 C67 C68 C69: library part CAP
C001 C002 C25 C26 C30 C45 C47 C48 C51 C57 C58 C60 C61: library part C
C49 C54 C59 C64: library part CAP, "0.1uF"
D1 D2 D6 D7 D8: library part DIODE
D3: library part 1N5824(SS54), "肖特基二极管"
D4 D5 D9 LED5: library part LED-RED, "红色LED"
J1: library part POW
L1 L2 L3 L4 L5: library part INDUCTOR
LED1 LED2 LED3 LED4: library part LED
P1: "SMA-J-P-H-ST-TH1"
Q1 Q4: library part PNP1
Q2 Q3 Q5: library part NPN1
R00 R8 R9 R10 R11 R12 R13 R17 R19 R20 R26 R27 R28 R29 R30 R31 R32 R33 R35 R36 R37 R38 R39 R40 R41 R42 R43 R44 R46 R47 R48 R49 R50 R51 R52 R53 R54 R55 R58: library part RES1
R1 R01 R2 R02 R3 R03 R4 R04 R5 R6 R7 R14 R15 R16: library part RES-1%, "高精度电阻"
R18: library part POT2
R21 R22 R23 R24 R25 R34 R45: library part Res
RN1: library part RESPACK
U3: library part W25X16, "W25X16;SST25VF016;MX25L1605"
U5: "STM32 ARM-based 32-bit MCU with 64 Kbytes Flash, 100-pin LQFP, Industrial Temperature"
U6: "实时时钟"
U7: library part MAX232
U8: "3A开关电源芯片"
U9: "以太网"
U12: "手机SIM卡"
Y1 Y2 Y4: library part XTAL, "Crystal Oscillator"
Y5: library part CRYSTAL

## Free pads (board coordinates)
  round 19.68 hole 11.81: 0(5592.96,4521.19) 0(5943.35,4519.22) 1(5592.96,4560.56) 1(5943.35,4558.59) 2(5632.33,4560.56) 2(5903.98,4558.59) 3(5632.33,4521.19) 3(5903.98,4519.22)
  round 0 hole 125.98: 3(5816.26,1898.2) 4(5366.26,1898.2)
  oct 196.85x196.85 hole 125.98: ""(1163.82,1597.96) ""(1163.82,4471.98) ""(6872.48,1597.96) ""(6872.48,4471.98)

## Via types
v1: diameter 19.68, hole 11.81, Top Layer to Bottom Layer, tented both sides, 697 vias
v2: diameter 15.75, hole 11.81, Top Layer to Bottom Layer, tented both sides, 8 vias
v3: diameter 39.37, hole 27.56, Top Layer to Bottom Layer, tented both sides, 5 vias
v4: diameter 39.37, hole 19.68, Top Layer to Bottom Layer, tented both sides, 1 vias

## Nets (pads, with @x,y where several pads share a name; then routed paths per layer and width w, separated by ;. In a path a pad name is that pad's centre, name@x,y a point inside that pad or via, vN(x,y) a via of type N, cw(c..) or ccw(c..) an arc to the next point about the centre after c; other vN are vias at no path point)
pads on no net: B1.1 B1.2 BAT1.0 BAT1.1 BAT1.2 C01.1 C1.1 C001.1 C001.2 C1.2 C01.2 C002.1 C2.1 C02.1 C02.2 C2.2 C002.2 C003.1 C03.1 C3.1 C003.2 C03.2 C3.2 C4.1 C004.1 C04.1 C4.2 C04.2 C004.2 C5.1 C5.2 C6.1 C6.2 C7.1 C7.2 C8.1 C8.2 C9.1 C9.2 C10.1 C10.2 C11.1 C11.2 C12.1 C12.2 C13.1 C13.2 C14.1 C14.2 C15.1 C15.2 C16.1 C16.2 C17.1 C17.2 C18.1 C18.2 C19.1 C19.2 C20.1 C20.2 C21.1 C21.2 C22.1 C22.2 C23.1 C23.2 C24.1 C24.2 C25.1 C25.2 C26.1 C26.2 C27.1 C27.2 C30.1 C30.2 C31.1 C31.2 C32.1 C32.2 C33.1 C33.2 C34.1 C34.2 C35.1 C35.2 C36.1 C36.2 C37.1 C37.2 C39.1 C39.2 C41.1 C41.2 C42.1 C42.2 C43.1 C43.2 C45.1 C45.2 C46.1 C46.2 C47.1 C47.2 C48.1 C48.2 C49.1 C49.2 C50.1 C50.2 C51.1 C51.2 C52.1 C52.2 C53.1 C53.2 C54.1 C54.2 C55.1 C55.2 C56.1 C56.2 C57.1 C57.2 C58.1 C58.2 C59.1 C59.2 C60.1 C60.2 C61.1 C61.2 C62.1 C62.2 C63.1 C63.2 C64.1 C64.2 C65.1 C65.2 C66.1 C66.2 C67.1 C67.2 C68.1 C68.2 C69.1 C69.2 D1.1 D1.2 D2.1 D2.2 D3.1 D3.2 D4.1 D4.2 D5.1 D5.2 D6.1 D6.2 D7.1 D7.2 D8.1 D8.2 D9.1 D9.2 J1.1 J1.2 J1.3 J2.1 J2.2 J2.3 J2.4 J2.5 J2.6 J2.7 J2.9 J2.S J3.1 J3.2 J3.3 J3.4 J3.5 J3.6 J3.7 J3.8 J3.9 J3.10 J4.1 J4.2 J4.3 J4.4 J5.1 J5.2 J5.3 J5.4 J5.5 J5.6 J5.7 J6.1 J6.2 J7.1 J7.2 J7.3 J7.4 J7.5 J7.6 J7.7 J7.8 J7.9 J7.10 J7.11 J9.1 J9.2 J9.3 J9.4 J9.5 J9.6 J9.7 J9.8 J9.9 J9.10 J9.11 J9.12 J9.13 J9.14 J9.15 J9.16 J9.17 J9.18 J9.19 J9.20 J10.0 J10.1 J10.2 J10.3 J10.4 J10.5 J11.1 J11.2 J11.3 J11.4 J11.5 J11.6 J11.7 J11.8 J11.9 J11.10 J11.11 J11.12 J11.13 J11.14 K0.1 K0.2 L1.1 L1.2 L2.1 L2.2 L3.1 L3.2 L4.1 L4.2 L5.1 L5.2 LED1.1 LED1.2 LED2.1 LED2.2 LED3.1 LED3.2 LED4.1 LED4.2 LED5.1 LED5.2 P1.1 P1.2 P1.3 P1.4 P1.5 Q1.1 Q1.2 Q1.3 Q2.1 Q2.2 Q2.3 Q3.1 Q3.2 Q3.3 Q4.1 Q4.2 Q4.3 Q5.1 Q5.2 Q5.3 R00.1 R00.2 R1.1 R01.1 R1.2 R01.2 R2.1 R02.1 R2.2 R02.2 R3.1 R03.1 R3.2 R03.2 R04.1 R4.1 R04.2 R4.2 R5.1 R5.2 R6.1 R6.2 R7.1 R7.2 R8.1 R8.2 R9.1 R9.2 R10.1 R10.2 R11.1 R11.2 R12.1 R12.2 R13.1 R13.2 R14.1 R14.2 R15.1 R15.2 R16.1 R16.2 R17.1 R17.2 R18.1 R18.2 R18.3 R19.1 R19.2 R20.1 R20.2 R21.1 R21.2 R22.1 R22.2 R23.1 R23.2 R24.1 R24.2 R25.1 R25.2 R26.1 R26.2 R27.1 R27.2 R28.1 R28.2 R29.1 R29.2 R30.1 R30.2 R31.1 R31.2 R32.1 R32.2 R33.1 R33.2 R34.1 R34.2 R35.1 R35.2 R36.1 R36.2 R37.1 R37.2 R38.1 R38.2 R39.1 R39.2 R40.1 R40.2 R41.1 R41.2 R42.1 R42.2 R43.1 R43.2 R44.1 R44.2 R45.1 R45.2 R46.1 R46.2 R47.1 R47.2 R48.1 R48.2 R49.1 R49.2 R50.1 R50.2 R51.1 R51.2 R52.1 R52.2 R53.1 R53.2 R54.1 R54.2 R55.1 R55.2 R58.1 R58.2 RN1.1 RN1.2 RN1.3 RN1.4 RN1.5 RN1.6 RN1.7 RN1.8 SW4.1 SW4.2 U1.1 U01.1 U1.2 U01.2 U1.3 U01.3 U01.4 U1.4 U1.5 U1.6 U1.7 U1.8 U2.1 U2.2 U2.3 U3.1 U3.2 U3.3 U3.4 U3.5 U3.6 U3.7 U3.8 U4.1 U4.2 U4.3 U4.4 U4.5 U4.6 U4.7 U4.8 U5.1 U5.2 U5.3 U5.4 U5.5 U5.6 U5.7 U5.8 U5.9 U5.10 U5.11 U5.12 U5.13 U5.14 U5.15 U5.16 U5.17 U5.18 U5.19 U5.20 U5.21 U5.22 U5.23 U5.24 U5.25 U5.26 U5.27 U5.28 U5.29 U5.30 U5.31 U5.32 U5.33 U5.34 U5.35 U5.36 U5.37 U5.38 U5.39 U5.40 U5.41 U5.42 U5.43 U5.44 U5.45 U5.46 U5.47 U5.48 U5.49 U5.50 U5.51 U5.52 U5.53 U5.54 U5.55 U5.56 U5.57 U5.58 U5.59 U5.60 U5.61 U5.62 U5.63 U5.64 U5.65 U5.66 U5.67 U5.68 U5.69 U5.70 U5.71 U5.72 U5.73 U5.74 U5.75 U5.76 U5.77 U5.78 U5.79 U5.80 U5.81 U5.82 U5.83 U5.84 U5.85 U5.86 U5.87 U5.88 U5.89 U5.90 U5.91 U5.92 U5.93 U5.94 U5.95 U5.96 U5.97 U5.98 U5.99 U5.100 U6.1 U6.2 U6.3 U6.4 U6.5 U6.6 U6.7 U6.8 U7.1 U7.2 U7.3 U7.4 U7.5 U7.6 U7.7 U7.8 U7.9 U7.10 U7.11 U7.12 U7.13 U7.14 U7.15 U7.16 U8.1 U8.2 U8.3 U8.4 U8.5 U8.6 U8.7 U8.8 U9.1 U9.2 U9.3 U9.4 U9.5 U9.6 U9.7 U9.8 U9.9 U9.10 U9.11 U9.12 U9.13 U9.14 U9.15 U9.16 U9.17 U9.18 U9.19 U9.20 U9.21 U9.22 U9.23 U9.24 U9.25 U9.26 U9.27 U9.28 U9.29 U9.30 U9.31 U9.32 U9.33 U9.34 U9.35 U9.36 U9.37 U9.38 U9.39 U9.40 U9.41 U9.42 U9.43 U9.44 U9.45 U9.46 U9.47 U9.48 U10.1 U10.2 U10.3 U10.4 U10.5 U10.6 U10.7 U10.8 U10.9 U10.10 U10.11 U10.12 U10.13 U10.14 U10.15 U10.16 U11.1 U11.2 U11.3 U11.4 U11.5 U11.6 U11.7 U11.8 U11.9 U11.10 U11.11 U11.12 U11.13 U11.14 U11.15 U11.16 U11.17 U11.18 U11.19 U11.20 U11.21 U11.22 U11.23 U11.24 U11.25 U11.26 U11.27 U11.28 U11.29 U11.30 U11.31 U11.32 U11.33 U11.34 U11.35 U11.36 U11.37 U11.38 U11.39 U11.40 U11.41 U11.42 U11.43 U11.44 U11.45 U11.46 U11.47 U11.48 U11.49 U11.50 U11.51 U11.52 U11.53 U11.54 U11.55 U11.56 U11.57 U11.58 U11.59 U11.60 U11.61 U11.62 U11.63 U11.64 U11.65 U11.66 U11.67 U11.68 U12.1 U12.2 U12.3 U12.4 U12.5 U12.6 U13.1 U13.2 U13.3 U13.4 U14.1 U14.2 U14.3 U14.4 U14.5 U14.6 X1.1 X1.2 X1.3 X2.1 X2.2 X2.3 Y1.1 Y1.2 Y2.1 Y2.2 Y2.3 Y4.1 Y4.2 Y5.1 Y5.2